# Altium PCB PCB_Two.PcbDoc
Units mil, origin at the board's own origin, x right, y up, seen from the top; angles counter-clockwise.
Board outline 5075 x 795 mil, 2 copper layers (Top Layer, Bottom Layer); 30 components, 47 nets, 147 pads, 90 vias.
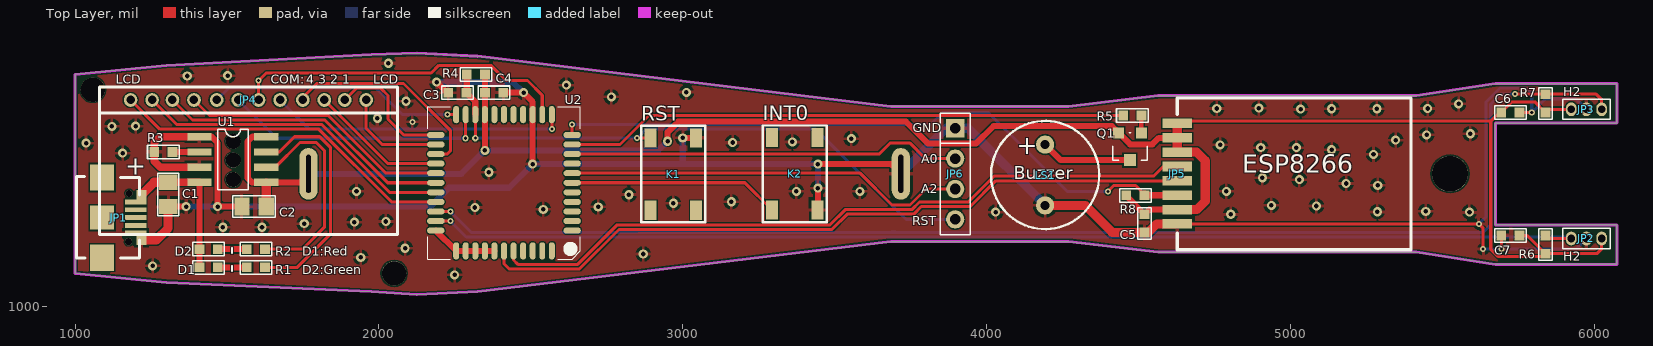
[diagram p0: Top Layer view]
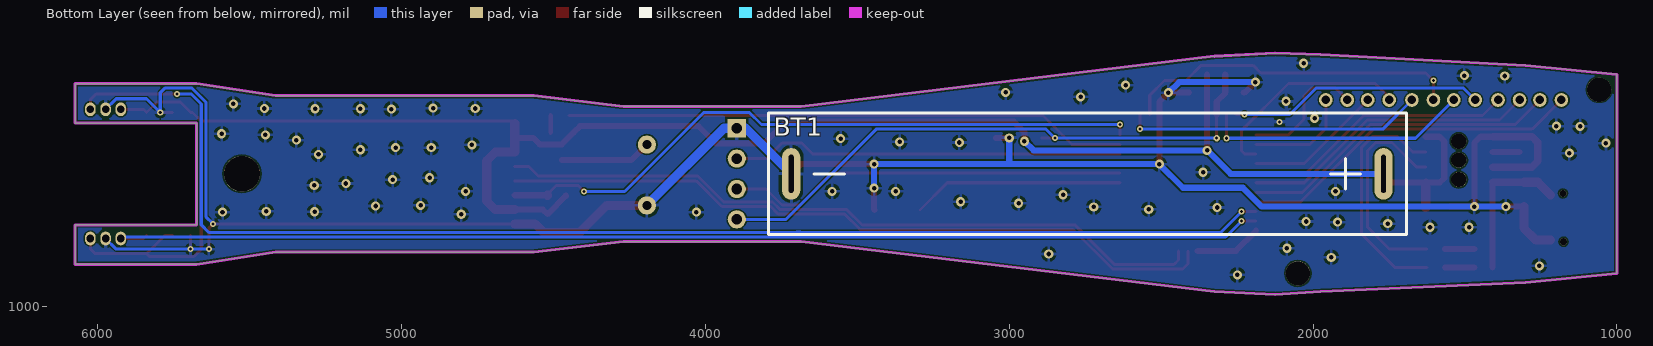
[diagram p1: Bottom Layer view, seen from below]

## Layer stack, top to bottom
Top Solder: solder mask 0.4, Solder Resist, Dk 3.5
Top Layer: signal copper 1.4
Dielectric 1: dielectric 12.6, FR-4, Dk 4.8
Bottom Layer: signal copper 1.4
Bottom Solder: solder mask 0.4, Solder Resist, Dk 3.5

## Board outline
1300,1080 1975,1050 2125,1040 2325,1050 3685,1215 4270,1215 4565,1180 5415,1180 5675,1140 6075,1140 6075,1270 5675,1270 5675,1605 6075,1605 6075,1735 5675,1735 5415,1695 4565,1695 4270,1660 3685,1660 2325,1825 2125,1835 1975,1830 1300,1795 1000,1765 1000,1110

## Design rules (kind name [scope] priority, off if disabled: settings)
Clearance [All] p1: gap=5
HoleSize [All] p1: absolutevalues=TRUE maxlimit=150 minlimit=1 maxpercent=80.000 minpercent=20.000
MinimumSolderMaskSliver [All] p1: minsoldermaskwidth=0
PolygonConnect [All] p1: connectstyle=Relief reliefconductorwidth=10 reliefentries=4 polygonreliefangle="90 Angle" airgapwidth=10
RoutingVias [All] p1: holewidth=15 width=30 viastyle="Through Hole" minholewidth=10 minwidth=20 maxholewidth=28 maxwidth=50
SilkToSilkClearance [All] p1: silktosilkclearance=0
SilkToSolderMaskClearance [IsPad] p1: minsilkscreentomaskgap=0 clearancetoexposedcopper=TRUE
SolderMaskExpansion [All] p1: expansion=4
Width [All] p1: maxlimit=50 minlimit=10 preferedwidth=20 minimp=50.000000 maximp=50.000000 favimp=50.000000
26 further rules are at their usual default settings.

## Components (designator, comment, footprint, x,y, rotation, side; value= is the part's Value field where it differs from the comment)
BT1 "BATTERY_1" "AAA Battery" 1768,1438 r0 bottom
C1 "4.7uF" 0805 1306,1330 r90 top
C2 "4.7uF" 0805 1549,1330 r0 top
C3 "Cap" 0603 2228,1705 r0 top
C4 "104" 0603 2409,1705 r180 top
C5 "104" 0603 4520,1245 r90 top
C6 "CAP_1" 0603 5755,1640 r180 top
C7 "CAP_1" 0603 5695,1235 r0 top
D1 "Red" 0603 1409,1130 r0 top
D2 "Green" 0603 1409,1190 r0 top
JP1 "MricoUSB" MircoUSB 1197,1345 r180 top
JP2 "H1" A3144 6025,1225 r180 top
JP3 "H2" A3144 6025,1650 r180 top
JP4 "LCD" LCD1621 1958,1681 r180 top
JP5 "ESP" ESP8266-11 4628,1273 r0 top
JP6 "ISP" SIP4 3897,1588 r270 top
K1 "RST" KEY-SMT 3044,1556 r270 top
K2 "Awake" KEY-SMT 3294,1319 r90 top
LS1 "SPEAKER" Buzzer-Small 4193,1534 r270 top
Q1 "PNP" SOT-23 4510,1573 r180 top
R1 "330" 0603 1565,1130 r0 top
R2 "1K" 0603 1565,1190 r0 top
R3 "3.3K" 0603 1320,1510 r180 top
R4 "Res1" 0603 2349,1765 r180 top
R5 "100" 0603 4510,1630 r180 top
R6 "330" 0603 5840,1175 r90 top
R7 "330" 0603 5840,1640 r90 top
R8 "10K" 0603 4460,1367 r0 top
U1 "CN3058" SO-8 1409,1560 r0 top
U2 "HT66FU50" LQFP44 2636,1251 r180 top

## Footprints (in the part's own frame and the unit in brackets; to place one, negate y for a bottom-side part, rotate by r counter-clockwise, add the part's x,y. Pads: shape width x height; smd on the part's side, far side on the other; paste and mask are expansions set on the pad)
0603 [mil]
  rect 32x32 smd: 1(0,0) 2(60,0)
  silkscreen extent -22,-22 82,22
0805 [mil]
  rect 50x60 smd: 1(0,0) 2(80,0)
  silkscreen extent -30,-35 110,35
A3144 [mil]
  oval 35x45 hole 25: 1(0,0) 2(50,0) 3(100,0)
  silkscreen extent -28,-33 128,33
"AAA Battery" [mil]
  oval 60x170 hole 16 slot 125 at 90 deg: 1(0,0) 2(1950,0)
  silkscreen extent -75,-200 2025,200
Buzzer-Small [mil]
  round 60 hole 30: 1(0,0) 2(200,0)
  silkscreen extent -78,-178 278,178
ESP8266-11 [mm]
  rect 2.5x0.8 smd: 1(0,0) 2(0,1.2) 3(0,2.4) 4(0,3.6) 5(0,4.8) 6(0,6) 7(0,7.2) 8(0,8.4)
  silkscreen extent 0,-2.16 19.56,10.54
KEY-SMT [mm]
  rect 1.6x1 smd: 1(0,0) 2(0,-3.81) 3(6.044,-3.81) 4(6.044,0)
  silkscreen extent -1.02,-4.57 7.06,0.76
LCD1621 [mil]
  round 45 hole 28: 1(0,0) 2(70.87,0) 3(137.8,0) 4(208.66,0) 5(283.46,0) 6(354.33,0) 7(421.26,0) 8(492.13,0) 9(566.93,0) 10(637.8,0) 11(704.72,0) 12(775.59,0)
  silkscreen extent -102,-43 878,43
LQFP44 [mm]
  oval 1.45x0.5 smd: 1(0,0) 2(0,-0.8) 3(0,-1.6) 4(0,-2.4) 5(0,-3.2) 6(0,-4) 7(0,-4.8) 8(0,-5.6) 9(0,-6.4) 10(0,-7.2) 11(0,-8) 23(11.4,-8) 24(11.4,-7.2) 25(11.4,-6.4) 26(11.4,-5.6) 27(11.4,-4.8) 28(11.4,-4) 29(11.4,-3.2) 30(11.4,-2.4) 31(11.4,-1.6) 32(11.4,-0.8) 33(11.4,0)
  oval 0.5x1.45 smd: 12(1.7,-9.7) 13(2.5,-9.7) 14(3.3,-9.7) 15(4.1,-9.7) 16(4.9,-9.7) 17(5.7,-9.7) 18(6.5,-9.7) 19(7.3,-9.7) 20(8.1,-9.7) 21(8.9,-9.7) 22(9.7,-9.7) 34(9.7,1.7) 35(8.9,1.7) 36(8.1,1.7) 37(7.3,1.7) 38(6.5,1.7) 39(5.7,1.7) 40(4.9,1.7) 41(4.1,1.7) 42(3.3,1.7) 43(2.5,1.7) 44(1.7,1.7)
  silkscreen extent -0.67,-10.37 12.08,2.38
MircoUSB [mm]
  rect 1.8x0.4 smd: 1(-0.05,0) 2(-0.05,0.65) 3(-0.05,1.3) 4(-0.05,1.95) 5(-0.05,2.6)
  rect 2x2.2 smd: 6(2.75,4.65) 7(2.75,-2.05)
  rect 2x2 smd: 8(2.75,1.3)
  silkscreen extent -0.37,-2.12 4.88,4.67
SIP4 [mil]
  rect 60x60 hole 35: 1(0,0)
  round 60 hole 35: 2(100,0) 3(200,0) 4(300,0)
  silkscreen extent -50,-50 350,50
SO-8 [mil]
  rect 80x24 smd: 1(0,0) 2(0,-50) 3(0,-100) 4(0,-150) 5(220,-150) 6(220,-100) 7(220,-50) 8(220,0)
  silkscreen extent 60,-175 160,25
SOT-23 [mil]
  rect 36x36 smd: 1(0,0) 2(75,0)
  rect 40x40 smd: 3(38,90)
  silkscreen extent -20,0 95,90

## Part data
BT1: "Battery"
C1 C2 C4: library part CAP1
C3: "无极性电容"
C5: library part Cap1
C6 C7: "Capacitor"
D1 D2: library part LED, "LED灯"
JP1: library part "HEADER 5"
JP2 JP3: library part "HEADER 3"
JP4: library part "HEADER 12"
JP5: library part "HEADER 8"
JP6: library part "HEADER 4"
K1 K2: library part SW-PB_1, "key"
Q1: "PNP Transistor"
R1 R2 R3 R5: library part Res2, "电阻"
R4: "贴片电阻"
R6 R8: library part RES2, "Resistor"
R7: library part Res2, "Resistor"

## Free pads (board coordinates)
  round 80 hole 80: 0(1058,1715) 0(2050,1110)
  round 118.11 hole 118.11: 0(5526,1438)
  rect 32x32 smd: 1(1218,1220) 1(1218,1368)
  round 50 hole 50: 2(1520,1419) 2(1520,1483) 2(1520,1545)

## Via types
v1: diameter 30, hole 15, Top Layer to Bottom Layer, 72 vias
v2: diameter 20, hole 10, Top Layer to Bottom Layer, 16 vias
v3: diameter 23.62, hole 23.62, Top Layer to Bottom Layer, 2 vias

## Nets (pads, with @x,y where several pads share a name; then routed paths per layer and width w, separated by ;. In a path a pad name is that pad's centre, name@x,y a point inside that pad or via, vN(x,y) a via of type N, cw(c..) or ccw(c..) an arc to the next point about the centre after c; other vN are vias at no path point)
GND: BT1.2 C1.1 C2.1 C3.1 C4.1 C5.1 C6.1 C7.1 JP1.5 JP2.2 JP3.2 JP5.1 JP6.1 K1.1 K2.2 LS1.2 pad.1@1218,1220 R3.2 U1.1 U1.3 U2.14 | length 7852.2
  Top Layer w10: JP5.1 v2(5621,1273) 5635,1259 v2(5635,1190) ; v2(5695,1190) C7.1 ; C6.1 v2(5795,1640)
  Top Layer w20: C1.1 v1(1365,1330) ; U1.1 1449,1560 1469,1540 v1(1469,1330) C2.1 ; v1(2190,1740) 2225,1705 C3.1 ; C4.1 v1(2476,1705) 2506.08,1674.92 U2.14 v1(2506.08,1470.08) ; v1(3000,1556) K1.1 ; K2.2 3445,1320 v1(3445,1391) ; v1(3445,1470) 3686,1470 BT1.2
  Top Layer w25: U1.3 1280,1460 1260,1480 R3.2 1260,1541 1279,1560 U1.1
  Top Layer w30: pad.1@1218,1220 1267,1220 1306,1259 C1.1 ; LS1.2 4325,1334 4414,1245 C5.1 4533,1245 4561,1273 JP5.1
  Bottom Layer w10: v2(5621,1273) 5645,1297 5645,1674.21 5690.79,1720 5780,1720 5795,1705 v2(5795,1640) 5840,1685 5940,1685 JP3.2 ; v2(5635,1190) v2(5695,1190) 5940,1190 JP2.2
  Bottom Layer w20: v1(1365,1330) v1(1469,1330) 2169,1330 2231,1392 2428,1392 v1(2506.08,1470.08) ; v1(2190,1740) 2441,1740 v1(2476,1705) ; v1@2506.08,1470 3000,1470 ; v1(3000,1556) 3000,1470 ; v1(3445,1391) v1(3445,1470) 3000,1470
  Bottom Layer w30: BT1.2 3868,1588 JP6.1 3939,1588 LS1.2
  other v1: 2249,1105 1255,1135 1940,1163 2870,1174 2086,1193 1486,1262 1615,1262 1754,1274 1919,1279 2023,1281 4804,1305 4030,1312 5590,1312 5287,1313 5446,1314 2541,1321 2316,1327 2722,1329 5086,1332 4938,1334 2969,1341 3160,1346 2823,1369 1926,1380 3374,1380 3583,1380 4790,1380 5288,1400 5184,1406 5030,1419 4908,1425 2362,1443 5274,1502 1156,1506 5136,1517 4903,1524 5020,1524 4769,1533 1036,1539 3164,1541 3361,1543 5347,1549 3555,1554 5449,1566 5593,1570 1121,1594 1199,1595 1995,1621 5034,1651 5136,1652 5285,1652 4758,1653 5452,1653 4897,1654 5554,1668 2089,1677 2765,1691 3012,1706 2617,1730 1369,1760 1502,1761 2031,1802
  other v2: 2110,1609
NC: U2.33 U2.34 U2.35 U2.36 U2.37 U2.38 | length 220.6
  Top Layer w20: U2.33 U2.34 U2.35 U2.36 U2.37 U2.38
NetD1_2: D1.2 R1.1 | length 96
  Top Layer w20: D1.2 R1.1
NetD2_2: D2.2 R2.1 | length 96
  Top Layer w20: D2.2 R2.1
NetLS1_1: LS1.1 Q1.3 | length 300.1
  Top Layer w20: LS1.1 4244,1483 Q1.3
NetQ1_1: Q1.1 R5.1 | length 57
  Top Layer w15: Q1.1 R5.1
NetR1_2: R1.2 U1.7 | length 792.4
  Top Layer w10: R1.2 1731,1130 1840,1239 1840,1525 1805,1560 1722,1560 1672,1510 U1.7
NetR2_2: R2.2 U1.6 | length 713.1
  Top Layer w10: R2.2 1748,1190 1820,1262 1820,1515 1794,1541 1740,1541 1659,1460 U1.6
NetR3_1: R3.1 U1.2 | length 89
  Top Layer w20: R3.1 U1.2
PA0: JP6.2 U2.9 | length 1297.9
  Top Layer w10: U2.9 3646.97,1502.97 3684,1540 3747,1540 3799,1488 JP6.2
PA1: U2.8
PA2: JP6.3 U2.7 | length 1326.4
  Top Layer w10: U2.7 3584.02,1439.98 3689,1335 3748,1335 3801,1388 JP6.3
PA3: K2.1 U2.6 | length 695.1
  Top Layer w10: U2.6 3204.52,1408.48 K2.1
PA4: U2.5
PA5: U2.4
PA6: U2.3
PA7: U2.2
PB1: U2.18
PB2: U2.17
PB3: U2.16
PB4: U2.15
PB5: U2.1
PB6: U2.44
PB7: U2.43
PC0: JP4.1 U2.24 | length 344.9
  Top Layer w10: JP4.1 1958,1587 2010.54,1534.46 U2.24
PC1: JP4.2 U2.23 | length 425.7
  Top Layer w10: JP4.2 1926.13,1720 2006,1720 2030,1696 2030,1618 2082.04,1565.96 U2.23
PC6: JP4.3 U2.26 | length 453.8
  Top Layer w10: JP4.3 2029.73,1471.47 U2.26
PC7: JP4.4 U2.25 | length 696.7
  Top Layer w10: JP4.4 1749.34,1689.34 1795,1735 2081,1735 2235,1581 2235,1513 2224.97,1502.97 U2.25
PD4: JP2.3 R6.2 U2.32 | length 3851.6
  Top Layer w10: U2.32 v2(2235,1282.5) ; R6.2 5850,1225 JP2.3
  Bottom Layer w10: v2(2235,1282.5) 2287.5,1230 3694.07,1230 ; 3693.5,1230.57 3694.07,1230 ; JP2.3 5920,1230 3694.07,1230
PD5: JP3.1 R7.2 U2.31 | length 4327.9
  Top Layer w10: U2.31 v2(2235,1313.99) ; v2(5740,1700) R7.2 6007,1700 6025,1682 JP3.1
  Bottom Layer w10: v2(2235,1313.99) 2303.99,1245 3686.72,1245 3687.29,1245.57 3699.72,1245.57 3700.28,1245 5635,1245 5660,1270 5660,1668 5692,1700 v2(5740,1700)
PD6: U2.42
PD7: U2.41
PE0: JP4.12 U2.30 | length 1143.7
  Top Layer w10: JP4.12 1278.41,1585 1802,1585 2041.51,1345.49 U2.30
PE1: JP4.11 U2.29 | length 1059.8
  Top Layer w10: JP4.11 1334.28,1600 1812,1600 2035.02,1376.98 U2.29
PE2: JP4.10 U2.28 | length 979.9
  Top Layer w10: JP4.10 1386.2,1615 1822,1615 2028.52,1408.48 U2.28
PE3: JP4.9 U2.27 | length 895.9
  Top Layer w10: JP4.9 1442.07,1630 1833,1630 2023.02,1439.98 U2.27
PE4: JP4.8 U2.22 | length 840.5
  Top Layer w10: v2(2225.89,1632.89) U2.22
  Bottom Layer w10: JP4.8 1504.87,1720 1990,1720 2077.11,1632.89 v2(2225.89,1632.89)
PE5: JP4.7 U2.21 | length 878.6
  Top Layer w10: v2(2285,1555) 2285.61,1555.61 U2.21
  Bottom Layer w10: JP4.7 1662.74,1555 v2(2285,1555)
PE6: JP4.6 U2.13 | length 1122.8
  Top Layer w10: JP4.6 1603.67,1744.67 v2(1604,1745) 1629,1770 2172,1770 2197,1795 2368,1795 2418,1745 2489,1745 2537.57,1696.43 U2.13
PE7: JP4.5 U2.12 | length 982.1
  Top Layer w10: v2(2569,1585) 2569.07,1585.07 U2.12
  Bottom Layer w10: JP4.5 1770.54,1585 v2(2569,1585)
PF0: JP5.3 R8.2 U2.11 | length 2175
  Top Layer w10: U2.11 v2(2636,1600) ; v2(4400,1380) 4400,1381 4418.73,1399.73 4491,1399.73 4520,1370.73 R8.2
  Top Layer w20: R8.2@4520.49,1367.49 JP5.3
  Top Layer w30: R8.2 R8.2@4520.49,1367.49
  Bottom Layer w10: v2(2636,1600) 3816,1600 3856,1640 4006,1640 4266,1380 v2(4400,1380)
PF1: R5.2 U2.10 | length 1853.6
  Top Layer w10: U2.10 2793.46,1534.46 2889,1630 R5.2
RESET: C3.2 JP6.4 K1.2 R4.2 U2.20 | length 1980.4
  Top Layer w10: v2(2317.1,1555.1) U2.20 ; v2(2850,1556) K1.2
  Top Layer w20: R4.2 2289,1706 C3.2 2317.1,1675.9 U2.20
  Bottom Layer w10: v2(2317.1,1555.1) v2@2849.1,1555.1 ; v2(2850,1556) 2879,1585 3438,1585 3735,1288 JP6.4
RX: JP5.5 U2.40 | length 2354.2
  Top Layer w10: U2.40 2443.09,1153.91 2457,1140 2654,1140 2784,1270 3485,1270 3535,1320 3754.21,1320 3779.21,1345 3940,1345 4025,1430 4550,1430 4581.98,1461.98 JP5.5
TX: JP5.4 U2.39 | length 2385.9
  Top Layer w10: U2.39 2411.59,1141.41 2428,1125 2660.21,1125 2790.11,1254.89 2852.89,1254.89 2853,1255 3491.21,1255 3541.21,1305 3760.43,1305 3785.43,1330 3946.21,1330 4030.95,1414.73 JP5.4
VCC: C1.2 D1.1 D2.1 JP1.1 pad.1@1218,1368 U1.4 | length 488.4
  Top Layer w20: D1.1 D2.1 U1.4
  Top Layer w25: C1.2 U1.4
  Top Layer w30: pad.1@1218,1368 1260,1410 C1.2
VDD: BT1.1 C2.2 C4.2 C5.2 C6.2 C7.2 JP2.1 JP3.3 JP5.2 JP5.6 JP5.7 JP5.8 Q1.2 R4.1 R6.1 R7.1 R8.1 U1.5 U1.8 U2.19 | length 6705.2
  Top Layer w10: JP5.8 4635.51,1611.21 5660,1611.21 ; C7.2 5780,1235 R6.1 ; JP3.3 5850,1650 R7.1 5805,1675 5730,1675 C6.2 5688.79,1640 5660,1611.21 ; JP2.1 6025,1191 6009,1175 R6.1 ; 5660,1611.21 5660,1190 5685,1165 5830,1165 R6.1
  Top Layer w20: U1.5@1629,1407 1626,1410 1582,1410 1568,1424 1568,1545 1583,1560 U1.8 ; U1.5 1740,1410 BT1.1 ; v1(2348.6,1515) U2.19 2349,1633.29 C4.2 R4.1 ; v1(2950,1545) 2950,1575 2985,1610 3735,1610 3807,1538 3966,1538 4023,1595 4413,1595 Q1.2 4473,1535 4546,1535 4567.46,1556.46 JP5.7 ; R8.1 4460,1365 C5.2 4535.24,1320.24 JP5.2
  Top Layer w30: C2.2@1629,1327 C2.2 U1.5@1629,1407 ; JP5.2 4692.24,1320.24 4720,1348 4720,1481 4691.78,1509.22 JP5.6 JP5.7 JP5.8
  Bottom Layer w20: BT1.1 2271.6,1438 v1(2348.6,1515) 2920,1515 v1(2950,1545)
pads on no net: JP1.2 JP1.3 JP1.4 JP1.6 JP1.7 JP1.8 K1.3 K1.4 K2.3 K2.4
copper on no net:
  other v3: 1175.35,1214.29 1177.32,1373.35

## Polygon pours and split planes (outlines as drawn)
GND on Top Layer "GND_L01_P018" (solid, remove dead copper, pour order 18): 1000,1835 1000,1040 6075,1040 6075,1835 1000,1835
GND on Bottom Layer "GND_L02_P020" (solid, remove dead copper, pour order 20): 1000,1835 1000,1040 6075,1040 6075,1835 1000,1835

## Keep-outs
Keep-Out Layer:
  the board outline again, w10

## Silkscreen, mask and mechanical layers (free items; w line width, h text height)
Top Overlay:
  circle w30: c2630,1191 r8.25
  lines w10: 1080,1640 1080,1238.36 1080.36,1238 2059.59,1238 2060.36,1238.77 2060.36,1640
  text "LCD" at 1133,1735 h30
  text "COM:" at 1644,1734 h30
  text "4 3 2 1" at 1760,1734 h30
  text "LCD" at 1982,1734 h30
  text "H2" at 5898,1693 h30
  text "INT0" at 3264,1614 h48
  text "RST" at 2864,1613 h48
  text "GND" at 3757,1575 h30
  text "+" at 4100,1503 h60
  text "A0" at 3785,1472 h30
  text "ESP8266" at 4842,1442 h60
  text "+" at 1165,1435 h60
  text "Buzzer" at 4089,1420 h42
  text "A2" at 3786,1374 h30
  text "RST" at 3755,1269 h30
  text "-" at 1540,1170 h60 r90
  text "D1:Red" at 1748,1168 h30
  text "H2" at 5898,1152 h30
  text "-" at 1540,1110 h60 r90
  text "D2:Green" at 1748,1108 h30